# Altium PCB 51 MCU Development board.PcbDoc
Units mm, origin at the board's own origin, x right, y up, seen from the top; angles counter-clockwise.
Board outline 114.38 x 83.01 mm, 2 copper layers (Top Layer, Bottom Layer); 86 components, 111 nets, 316 pads, 127 vias.
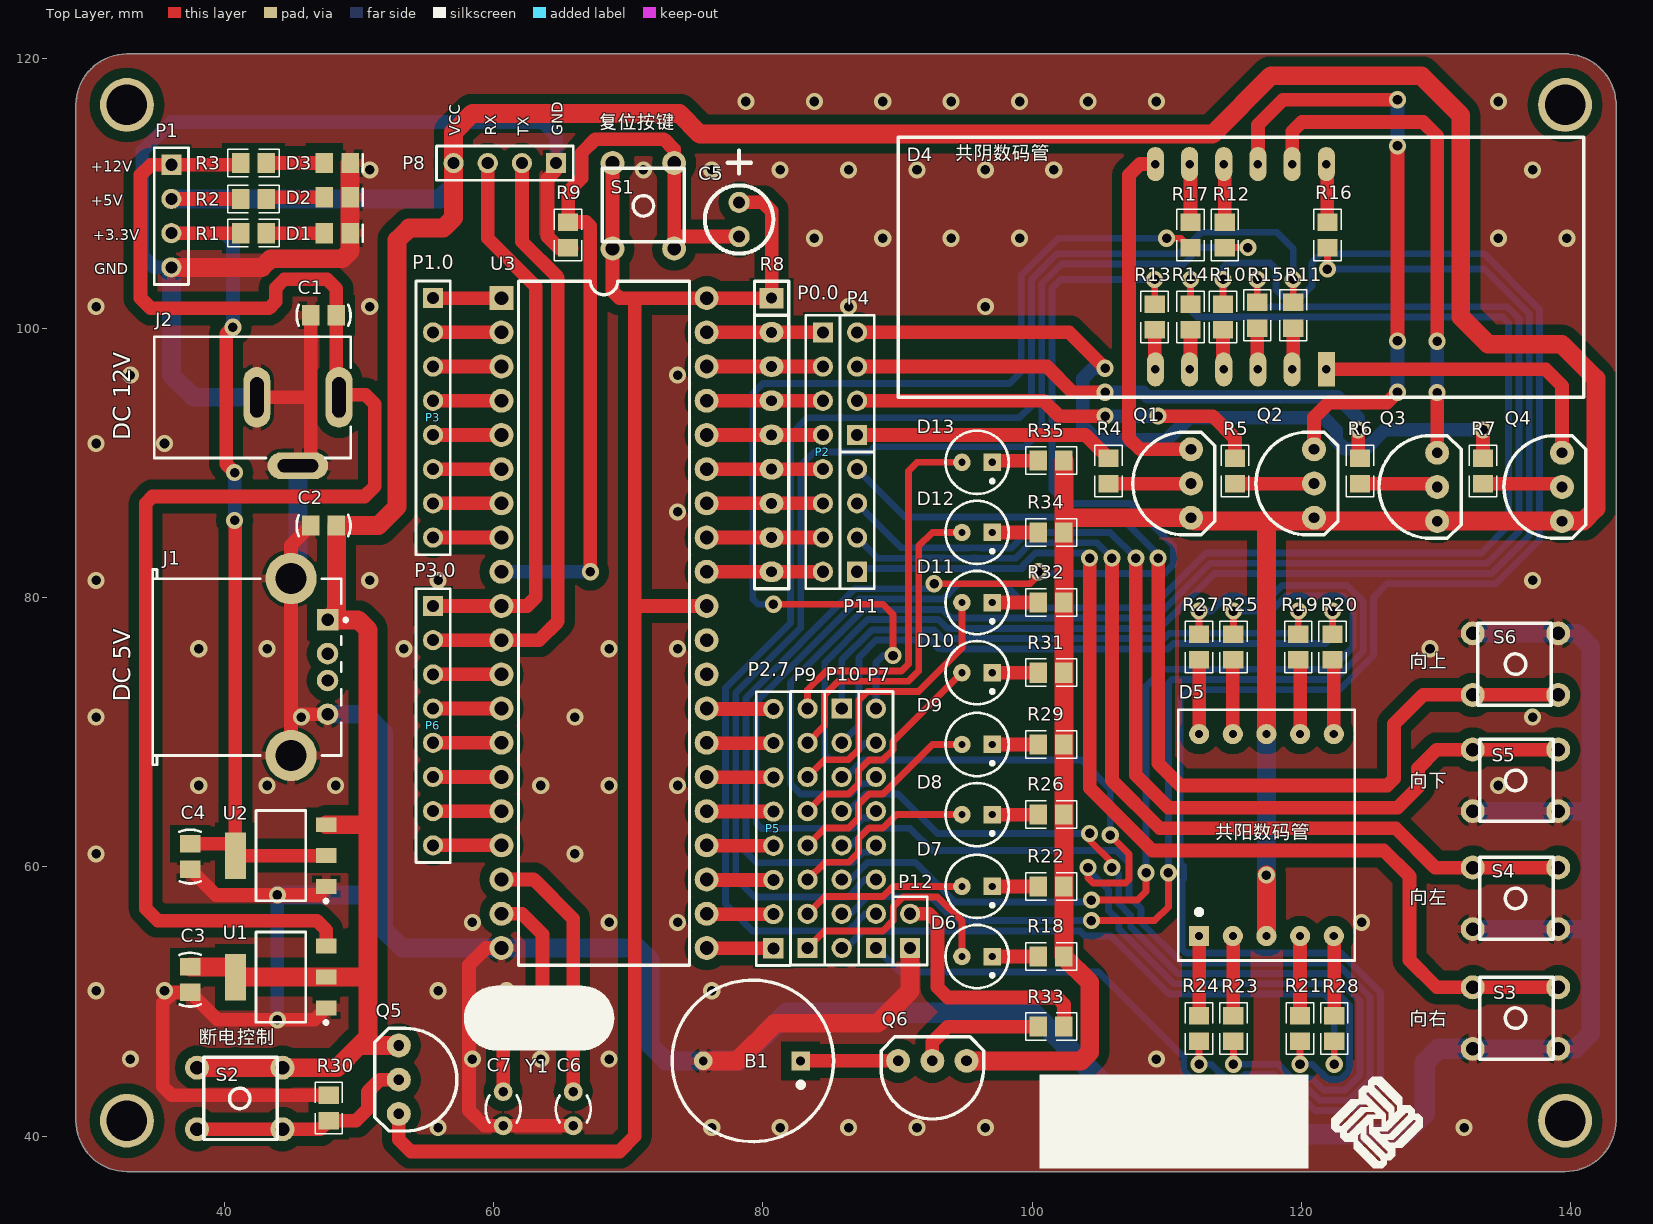
[diagram p0: Top Layer view]
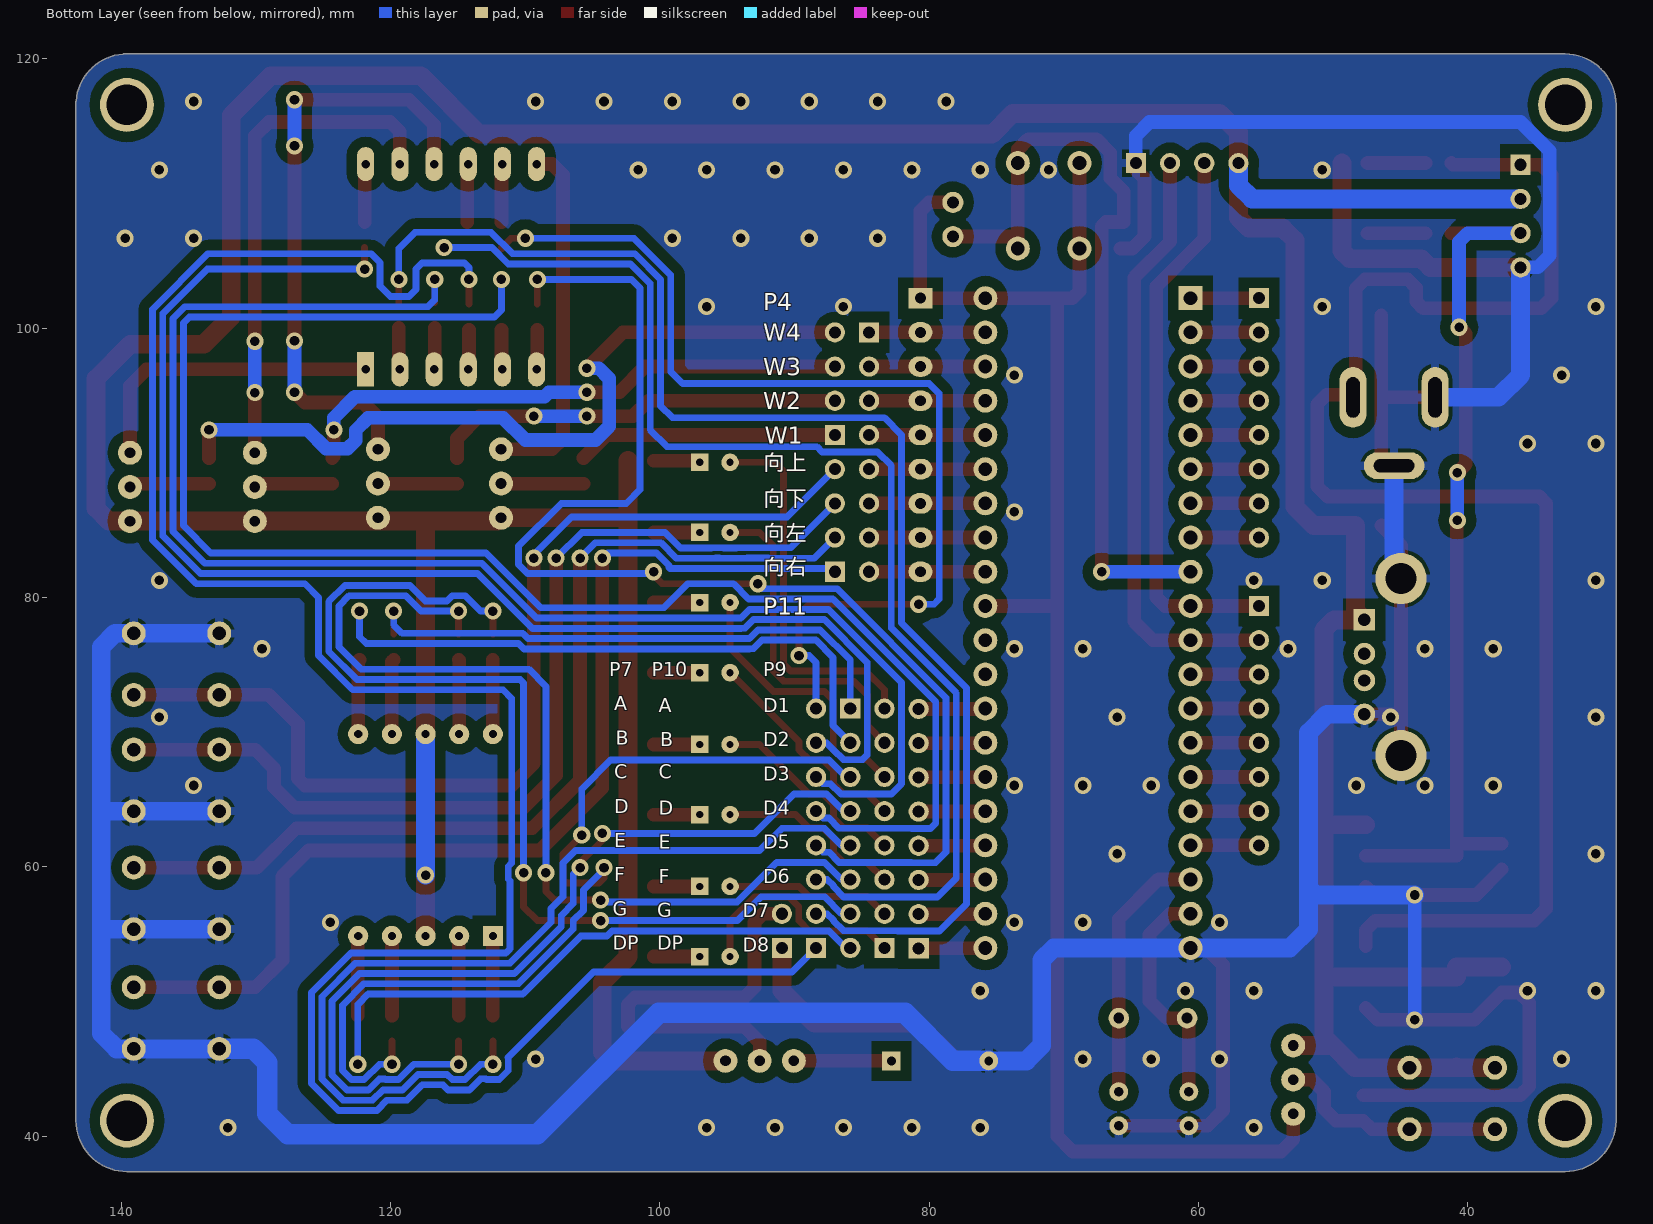
[diagram p1: Bottom Layer view, seen from below]

## Layer stack, top to bottom
Top Solder: solder mask 0.0102, Solder Resist, Dk 3.5
Top Layer: signal copper 0.0356
Dielectric 1: dielectric 0.32, FR-4, Dk 4.8
Bottom Layer: signal copper 0.0356
Bottom Solder: solder mask 0.0102, Solder Resist, Dk 3.5

## Board outline
32.766,37.363 cw(c32.766,41.148) 28.981,41.147 cw(c32.766,41.148) 28.981,41.148 28.981,116.586 cw(c32.766,116.586) 32.766,120.371 139.827,120.371 cw(c139.827,120.269) 139.875,120.359 cw(c139.573,116.586) 143.346,116.888 cw(c143.256,116.84) 143.358,116.84 143.358,116.586 ccw(c143.256,116.586) 143.358,116.586 ccw(c139.573,116.586) 143.358,116.586 143.358,41.149 143.358,41.148 ccw(c143.256,41.148) 143.358,41.149 143.358,41.148 cw(c139.573,41.148) 139.573,37.363

## Design rules (kind name [scope] priority, off if disabled: settings)
Clearance Clearance_1 [InPolygon] p1: gap=0.762 ignorepadtopadclearanceinfootprint=FALSE
Clearance [All] p2: gap=0.254 ignorepadtopadclearanceinfootprint=FALSE
ComponentClearance [All] p1 off: gap=0.254 collisioncheckmode=3 verticalgap=0.254 showdistances=FALSE
PolygonConnect PolygonConnect_1 [isvia] p1: connectstyle=Direct reliefconductorwidth=0.254 reliefentries=4 polygonreliefangle="90 Angle" airgapwidth=0.254
PolygonConnect [All] p2: connectstyle=Relief reliefconductorwidth=0.635 reliefentries=4 polygonreliefangle="90 Angle" airgapwidth=0.254
RoutingVias [All] p1: holewidth=0.711 width=1.27 viastyle="Through Hole" minholewidth=0.711 minwidth=1.27 maxholewidth=0.711 maxwidth=1.27
SolderMaskExpansion [All] p1: expansion=0.102
Width [All] p1: maxlimit=2.54 minlimit=0.254 preferedwidth=0.254
29 further rules are at their usual default settings.

## Components (designator, comment, footprint, x,y, rotation, side; value= is the part's Value field where it differs from the comment)
B1 "蜂鸣器" 蜂鸣器 82.804,45.593 r180 top
C1 "Cap" C-RAD-0805 47.371,100.965 r0 top
C2 "Cap" C-RAD-0805 47.371,85.344 r0 top
C3 "Cap" C-RAD-0805 37.465,51.623 r90 top
C4 "Cap" C-RAD-0805 37.465,60.767 r90 top
C5 "Cap Pol1" 10UF 78.232,109.347 r270 top value=10uF
C6 "Cap" C-RAD 65.913,42.037 r90 top
C7 "Cap" C-RAD 60.706,42.037 r90 top
D1 "LED0" LED_0805 48.387,107.061 r0 top
D2 "LED0" LED_0805 48.387,109.728 r0 top
D3 "LED0" LED_0805 48.387,112.268 r0 top
D4 "4_8SEG_LED" 4BIT_8SEG_LED 108.204,105.156 r0 top
D5 "八位数码管" 八位数码管 112.395,54.864 r0 top
D6 "LED0" LED直插 97.028,53.34 r180 top
D7 "LED0" LED直插 97.028,58.547 r180 top
D8 "LED0" LED直插 97.028,63.881 r180 top
D9 "LED0" LED直插 97.028,69.088 r180 top
D10 "LED0" LED直插 97.028,74.422 r180 top
D11 "LED0" LED直插 97.028,79.629 r180 top
D12 "LED0" LED直插 97.028,84.836 r180 top
D13 "LED0" LED直插 97.028,90.043 r180 top
J1 "USB" USB_A1 34.678,74.837 r180 top
J2 "PWRCON" DC-005 49.403,94.869 r180 top
P1 "Header 4" HDR4X1_A 36.068,112.141 r270 top
P2 "Header 8" HDR1X8 84.455,99.695 r270 top
P3 "Header 8" HDR1X8 55.499,102.235 r270 top
P4 "Header 4" HDR4X1_A 86.995,92.075 r90 top
P5 "Header 8" HDR1X8 80.772,53.948 r90 top
P6 "Header 8" HDR1X8 55.499,79.375 r270 top
P7 "Header 8" HDR1X8 88.392,53.975 r90 top
P8 "串口" HDR4X1_A 64.643,112.268 r180 top
P9 "Header 8" HDR1X8 83.312,53.975 r90 top
P10 "Header 8" HDR1X8 85.852,71.755 r270 top
P11 "Header 4" HDR4X1_A 86.995,81.915 r90 top
P12 "Header 2" HDR2X1_A 90.932,53.975 r90 top
Q1 "PNP" TO-92 114.173,85.979 r90 top
Q2 "PNP" TO-92 123.317,85.979 r90 top
Q3 "PNP" TO-92 132.461,85.725 r90 top
Q4 "PNP" TO-92 141.732,85.725 r90 top
Q5 "PNP" TO-92 50.571,46.685 r270 top
Q6 "PNP" TO-92 95.072,47.981 r180 top
R1 "Res1" 0805-1 42.164,107.061 r0 top
R2 "Res1" 0805-1 42.164,109.601 r0 top
R3 "Res1" 0805-1 42.164,112.268 r0 top
R4 "Res1" 0805-1 105.664,89.408 r90 top
R5 "Res1" 0805-1 115.062,89.408 r90 top
R6 "Res1" 0805-1 124.333,89.408 r90 top
R7 "Res1" 0805-1 133.477,89.408 r90 top
R8 "RES10" SIP9 80.645,102.235 r270 top
R9 "Res1" 0805-1 65.532,106.934 r90 top
R10 "Res1" 0805-1 114.173,100.838 r270 top
R11 "Res1" 0805-1 119.38,100.965 r270 top
R12 "Res1" 0805-1 114.3,106.934 r90 top
R13 "Res1" 0805-1 109.093,100.838 r270 top
R14 "Res1" 0805-1 111.76,100.838 r270 top
R15 "Res1" 0805-1 116.713,100.965 r270 top
R16 "Res1" 0805-1 121.92,106.934 r90 top
R17 "Res1" 0805-1 111.76,106.934 r90 top
R18 "Res1" 0805-1 101.407,53.34 r180 top
R19 "Res1" 0805-1 119.761,76.327 r270 top
R20 "Res1" 0805-1 122.301,76.327 r270 top
R21 "Res1" 0805-1 119.888,48.006 r90 top
R22 "Res1" 0805-1 101.407,58.547 r180 top
R23 "Res1" 0805-1 114.935,48.006 r90 top
R24 "Res1" 0805-1 112.395,48.006 r90 top
R25 "Res1" 0805-1 114.935,76.327 r270 top
R26 "Res1" 0805-1 101.407,63.881 r180 top
R27 "Res1" 0805-1 112.395,76.327 r270 top
R28 "Res1" 0805-1 122.428,48.006 r90 top
R29 "Res1" 0805-1 101.407,69.088 r180 top
R30 "Res1" 0805-1 47.752,42.098 r270 top
R31 "Res1" 0805-1 101.407,74.422 r180 top
R32 "Res1" 0805-1 101.407,79.629 r180 top
R33 "Res1" 0805-1 101.407,48.133 r0 top
R34 "Res1" 0805-1 101.407,84.836 r180 top
R35 "Res1" 0805-1 101.407,90.17 r180 top
S1 "SW-PB4" AN66 71.12,109.093 r180 top
S2 "SW-PB4" AN66 41.148,42.799 r90 top
S3 "SW-PB4" AN66 135.89,48.768 r90 top
S4 "SW-PB4" AN66 135.89,57.658 r90 top
S5 "SW-PB4" AN66 135.89,66.421 r90 top
S6 "SW-PB4" AN66 135.89,75.057 r270 top
U1 "ASM1117_5V" SOT-223 44.196,51.816 r90 top
U2 "ASM1117_3.3V" SOT-223 44.196,60.833 r90 top
U3 "STC89C52RC" DIP-40W 60.579,102.235 r0 top
Y1 "XTAL" X-HC49U 63.373,48.768 r0 top value=12M

## Footprints (in the part's own frame and the unit in brackets; to place one, negate y for a bottom-side part, rotate by r counter-clockwise, add the part's x,y. Pads: shape width x height; smd on the part's side, far side on the other; paste and mask are expansions set on the pad)
4BIT_8SEG_LED [mil]
  oval 50x100 hole 25: a(137,277) b(537,277) c(337,-323) d(137,-323) e(37,-323) f(237,277) g(437,-323) h(237,-323) M1(37,277) M2(337,277) M3(437,277)
  rect 50x100 hole 25: M4(537,-323)
  silkscreen extent -715,-405 1290,355
10UF [mil]
  round 62 hole 35.43: 1(0,0) 2(100,0)
  silkscreen extent -152,-100 150,100
0805-1 [mm] "贴片带丝印"
  rect 1.3x1.5 smd: 1(-0.95,0) 2(0.95,0)
  silkscreen extent -1.91,-1.02 1.91,1.02, body extent -1.14,-0.51 1.14,0.51, height 1
AN66 [mil]
  round 70 hole 40: 1(-90,125) 2(90,125) 3(90,-125) 4(-90,-125)
  silkscreen extent -120,-110 120,105
C-RAD [mm] "瓷片电容"
  round 1.4 hole 0.7: 1(-1.27,0) 2(1.27,0)
  silkscreen extent -1.02,-1.3 0.98,1.3
C-RAD-0805 [mm] "贴片电容"
  rect 1.3x1.5 smd: 1(-0.95,0) 2(0.95,0)
  silkscreen extent -2,-0.79 2,0.79, body extent -1.27,-0.64 1.27,0.64, height 0.9
DC-005 [mm] "DC母座5.5mm"
  oval 2x4.5 hole 1 slot 3 at 90 deg: 1(0.889,0) 2(6.985,0)
  oval 4.5x2 hole 1 slot 3 at 0 deg: 3(3.937,5.08)
  silkscreen extent 0,-4.5 14.6,4.5, body extent 0,-4.44 14.6,4.45, height 11
DIP-40W [mil]
  rect 70x70 hole 40: 1(0,0)
  round 70 hole 40: 2(0,-100) 3(0,-200) 4(0,-300) 5(0,-400) 6(0,-500) 7(0,-600) 8(0,-700) 9(0,-800) 10(0,-900) 11(0,-1000) 12(0,-1100) 13(0,-1200) 14(0,-1300) 15(0,-1400) 16(0,-1500) 17(0,-1600) 18(0,-1700) 19(0,-1800) 20(0,-1900) 21(600,-1900) 22(600,-1800) 23(600,-1700) 24(600,-1600) 25(600,-1500) 26(600,-1400) 27(600,-1300) 28(600,-1200) 29(600,-1100) 30(600,-1000) 31(600,-900) 32(600,-800) 33(600,-700) 34(600,-600) 35(600,-500) 36(600,-400) 37(600,-300) 38(600,-200) 39(600,-100) 40(600,0)
  silkscreen extent 50,-1950 550,50
HDR1X8 [mm] "Connector; Header; 8 Position"
  rect 1.5x1.5 hole 0.9: 1(0,0)
  round 1.5 hole 0.9: 2(2.54,0) 3(5.08,0) 4(7.62,0) 5(10.16,0) 6(12.7,0) 7(15.24,0) 8(17.78,0)
  silkscreen extent -1.27,-1.27 19.05,1.27
HDR2X1_A [mm] "Connector; Header; 2 Position"
  rect 1.5x1.5 hole 0.9: 1(0,0)
  round 1.5 hole 0.9: 2(2.54,0)
  silkscreen extent -1.27,-1.27 3.81,1.27
HDR4X1_A [mm] "Connector; Header; 4 Position"
  rect 1.5x1.5 hole 0.9: 1(0,0)
  round 1.5 hole 0.9: 2(2.54,0) 3(5.08,0) 4(7.62,0)
  silkscreen extent -1.27,-1.27 8.89,1.27
LED_0805 [mm] "贴片二极管"
  rect 1.3x1.5 smd: 1(-0.95,0) 2(0.95,0)
  silkscreen extent 1.91,-0.64 1.91,0.64
LED直插 [mm]
  rect 1.3x1.3 hole 0.54: 1(0,0)
  round 1.3 hole 0.54: 2(2.25,0)
  silkscreen extent -1.22,-2.35 3.48,2.35
SIP9 [mil]
  rect 60x70 hole 32: 1(0,0)
  oval 60x70 hole 32: 2(100,0) 3(200,0) 4(300,0) 5(400,0) 6(500,0) 7(600,0) 8(700,0) 9(800,0)
  silkscreen extent -50,-50 850,50
SOT-223 [mm]
  rect 1.1x1.55 smd: 1(-2.3,-3.375) 2(0,-3.375) 3(2.3,-3.375)
  rect 3.45x1.55 smd: 4(0,3.375)
  silkscreen extent -3.5,-3.48 3.35,1.85, body extent -3.3,-3.94 3.3,3.43, height 0.8
TO-92 [mil]
  round 70 hole 31.5: B(98,94) C(198,94) E(-2,94)
  silkscreen extent -52,24 248,264
USB_A1 [mm]
  rect 1.6x1.6 hole 0.92: 1(-12.99,-3.5)
  round 1.6 hole 0.92: 2(-12.99,-1) 3(-12.99,1) 4(-12.99,3.5)
  round 3.8 hole 2.3: 5(-10.28,6.57) 6(-10.28,-6.57)
  silkscreen extent -14.47,-7.25 0,7.25
X-HC49U [mil] "插件晶振"
  round 60 hole 32: 1(-100,0) 2(100,0)
  silkscreen extent -215,-90 215,90
八位数码管 [mm]
  rect 1.5x1.5 hole 0.6: 1(0,0)
  round 1.5 hole 0.6: 2(2.5,0) 3(5,0) 4(7.5,0) 5(10,0) 6(10,15) 7(7.5,15) 8(5,15) 9(2.5,15) 10(0,15)
  silkscreen extent -1.56,-1.81 11.56,16.81
蜂鸣器 [mm]
  rect 1.4x1.4 hole 0.66: 1(0,0)
  round 1.4 hole 0.66: 2(7.239,0)
  silkscreen extent -2.44,-6 9.55,6

## Part data
C1 C2 C3 C4 C6 C7: "无极性电容"
C5: "Polarized Capacitor (Radial)", LatestRevisionDate=17-Jul-2002, LatestRevisionNote="Re-released for DXP Platform.", PackageDescription="Polarized Capacitor (Radial); 2 Leads", PackageReference=RB7.6-15, Published=8-Jun-2000, Publisher="Altium Limited"
D1 D2 D3 D6 D7 D8 D9 D10 D11 D12 D13: "发光二极管"
  D6 D7 D8 D9 D10 D11 D12 D13: LatestRevisionDate=08-Jul-2005, LatestRevisionNote="Mech Layer 1 removed.", PackageReference=LED-0, Published=8-Jun-2000, Publisher="Altium Limited"
J1: "USB接口"
J2: "直流电源端子"
P1 P4 P11 P12: "接插件", LatestRevisionDate=17-Jul-2002, LatestRevisionNote="Re-released for DXP Platform.", Publisher="Altium Limited"
P2 P3 P5 P6 P7 P9 P10: "Header, 8-Pin", LatestRevisionDate=17-Jul-2002, LatestRevisionNote="Re-released for DXP Platform.", Publisher="Altium Limited"
P8: library part "Header 4", "接插件", LatestRevisionDate=17-Jul-2002, LatestRevisionNote="Re-released for DXP Platform.", Publisher="Altium Limited"
R1 R2 R3 R4 R5 R6 R7 R9 R10 R11 R12 R13 R14 R15 R16 R17 R18 R19 R20 R21 R22 R23 R24 R25 R26 R27 R28 R29 R30 R31 R32 R33 R34 R35: "贴片电阻"
S1 S2 S3 S4 S5 S6: "微动开关", LatestRevisionDate=17-Jul-2002, LatestRevisionNote="Re-released for DXP Platform.", PackageReference=SPST-2, Published=24-Mar-1999, Publisher="Altium Limited"
U1 U2: library part ASM1117, "3.3V稳压芯片"
Y1: "晶振", LatestRevisionDate=17-Jul-2002, LatestRevisionNote="Re-released for DXP Platform.", PackageReference=R38, Published=8-Jun-2000, Publisher="Altium Limited"

## Free pads (board coordinates)
  round 4 hole 3 unplated: 0(32.766,41.148) 0(32.766,116.586) 0(139.573,41.148) 0(139.573,116.586)

## Via types
v1: diameter 1.27, hole 0.711, Top Layer to Bottom Layer, tented both sides, 127 vias

## Nets (pads, with @x,y where several pads share a name; then routed paths per layer and width w, separated by ;. In a path a pad name is that pad's centre, name@x,y a point inside that pad or via, vN(x,y) a via of type N, cw(c..) or ccw(c..) an arc to the next point about the centre after c; other vN are vias at no path point)
+3.3V: C4.2 P1.3 R1.1 U2.2 U2.4 | length 66.2
  Top Layer w1.016: P1.3 R1.1 ; C4.2 40.645,61.717 U2.4@40.821,61.541 ; v1(40.64,100.076) 40.132,99.568 40.132,89.916 v1(40.767,89.281) ; v1(40.767,85.725) 40.821,85.671 U2.4@40.821,61.541 ; U2.2 U2.4 U2.4@40.821,61.541
  Bottom Layer w1.016: P1.3 40.005,107.061 40.64,106.426 v1(40.64,100.076) ; v1(40.767,85.725) v1(40.767,89.281)
+5V: C2.2 C3.2 D5.3 D5.8 J1.1 P1.2 P8.4 Q1.E Q2.E Q3.E Q4.E Q5.E Q6.E R2.1 R18.1 R22.1 R26.1 R29.1 R31.1 R32.1 R34.1 R35.1 S2.2 S2.3 U1.2 U1.4 U2.3 | length 379.5
  Top Layer w1.016: P1.2 R2.1
  Top Layer w1.397: C3.2 40.821,52.573 U1.4 U1.2 50.673,51.816 ; S2.2 40.894,45.085 ; 40.821,45.158 40.894,45.085 ; U2.3 50.673,63.133 ; Q5.E 50.038,46.736 ; Q6.E 103.632,45.593 104.267,46.228 104.267,51.43 R18.1 R22.1 R26.1 R29.1 R31.1 R32.1 R34.1 102.357,86.106 ; R35.1 102.357,86.106 ; D5.3 v1(117.395,59.389) ; D5.8 117.395,85.594 117.475,85.674 ; 40.894,45.085 S2.3 48.387,45.085 50.038,46.736 ; 50.038,46.736 50.673,47.371 50.673,51.816 ; 50.673,51.816 50.673,63.133 ; 50.673,63.133 50.673,77.597 49.933,78.337 J1.1 48.321,78.99 C2.2 51.435,85.344 52.832,86.741 52.832,106.553 53.721,107.442 56.261,107.442 57.023,108.204 P8.4 57.023,114.554 58.42,115.951 73.787,115.951 75.324,114.414 113.398,114.414 117.729,118.745 128.905,118.745 131.826,115.824 131.826,100.838 133.858,98.806 139.319,98.806 141.859,96.266 141.859,86.614 140.919,85.674 Q4.E Q3.E 117.475,85.674 ; 102.357,86.106 102.535,85.928 Q1.E 112.039,85.674 117.475,85.674
  Bottom Layer w1.397: P1.2 56.007,109.601 57.023,110.617 P8.4 ; v1(117.395,59.389) D5.8
+5V_MCU: C5.1 Q5.C R8.1 S1.2 S1.3 U3.31 U3.40 | length 118.6
  Top Layer w1.016: Q5.C 52.959,39.751 53.848,38.862 69.342,38.862 70.485,40.005 70.485,79.248 ; S1.3 S1.2 68.834,102.743 69.342,102.235 70.358,102.235 ; U3.31 70.612,79.375 70.485,79.248 ; C5.1 80.01,109.347 80.645,108.712 R8.1 U3.40 70.358,102.235 ; 70.358,102.235 70.485,102.108 70.485,79.248
+12V: C1.2 J2.1 P1.1 R3.1 U1.3 | length 113.9
  Top Layer w1.016: R3.1 41.087,112.141 P1.1 34.544,112.141 33.782,111.379 33.782,102.235 34.544,101.473 43.307,101.473 43.815,101.981 43.815,102.997 44.45,103.632 47.625,103.632 48.321,102.936 C1.2 J2.1@48.321,95.062 ; U1.3 47.571,55.299 46.863,56.007 35.052,56.007 34.163,56.896 34.163,86.995 34.671,87.503 50.419,87.503 51.181,88.265 51.181,94.361 50.48,95.062 J2.1@48.321,95.062 ; J2.1 J2.1@48.321,95.062
GND: B1.2 C1.1 C2.1 C3.1 C4.1 C6.1 C7.1 D1.2 D2.2 D3.2 J1.4 J1.5 J1.6 J2.2 J2.3 P1.4 P8.1 P12.1 R9.1 R30.1 S3.1 S3.4 S4.1 S4.4 S5.1 S5.4 S6.1 S6.4 U1.1 U2.1 U3.20 | length 419.4
  Top Layer w1.016: C4.1 39.37,57.912 v1(43.942,57.912) 46.95,57.912 U2.1 ; J2.2 46.294,94.869 46.421,94.996 ; J1.5 44.958,71.374 ; J2.3 46.421,89.789 46.421,94.996 ; C2.1 44.958,83.881 J1.6 44.958,71.374 ; C1.1 46.421,94.996 ; U1.1 46.696,48.641 v1(43.942,48.641) 39.497,48.641 C3.1 36.195,50.673 35.433,49.911 35.433,43.688 36.073,43.048 R30.1 ; J1.4 44.995,71.337 44.958,71.374 ; U3.20 59.436,53.975 58.166,52.705 58.166,41.91 59.309,40.767 C7.1 C6.1 ; P8.1 64.643,111.76 64.008,111.125 64.008,106.807 64.897,105.918 R9.1@65.786,105.918
  Top Layer w1.397: P1.4 42.799,104.521 43.434,105.156 48.768,105.156 49.337,105.725 D1.2 D2.2 D3.2 ; B1.2 78.105,45.593 80.899,48.387 88.519,48.387 90.932,50.8 P12.1
  Bottom Layer w1.016: P1.4 34.798,104.521 33.909,105.41 33.909,113.157 36.068,115.316 63.627,115.316 64.643,114.3 P8.1 ; v1(43.942,48.641) v1(43.942,57.912)
  Bottom Layer w1.397: P1.4 36.068,96.52 37.719,94.869 J2.2 ; v1(43.942,57.912) 51.308,57.912 51.816,58.42 ; J1.6 45.466,81.915 J2.3 ; J1.4 50.456,71.337 51.816,69.977 51.816,58.42 ; B1.2 72.771,45.593 71.628,46.736 71.628,53.086 70.739,53.975 U3.20 53.213,53.975 51.816,55.372 51.816,58.42 ; S3.1 S3.4 140.335,46.482 141.478,47.625 141.478,55.626 ; S4.1 S4.4 141.224,55.372 141.478,55.626 ; S5.1 S5.4 141.097,64.135 141.478,64.516 ; S6.4 S6.1 140.462,77.343 141.478,76.327 141.478,64.516 ; 141.478,55.626 141.478,64.516
  Bottom Layer w1.524: B1.2 78.232,45.593 81.788,49.149 100.076,49.149 109.093,40.132 127.635,40.132 129.159,41.656 129.159,45.466 130.175,46.482 S3.1
  other v1: 55.88,40.64 76.2,40.64 81.28,40.64 86.36,40.64 91.44,40.64 96.52,40.64 132.08,40.64 33.02,45.72 58.42,45.72 63.5,45.72 68.58,45.72 109.22,45.72 30.48,50.8 35.56,50.8 55.88,50.8 60.96,50.8 76.2,50.8 58.42,55.88 68.58,55.88 73.66,55.88 124.46,55.88 30.48,60.96 66.04,60.96 38.1,66.04 43.18,66.04 48.26,66.04 63.5,66.04 68.58,66.04 73.66,66.04 134.62,66.04 30.48,71.12 45.72,71.12 66.04,71.12 137.16,71.12 38.1,76.2 43.18,76.2 53.34,76.2 68.58,76.2 73.66,76.2 129.54,76.2 30.48,81.28 50.8,81.28 55.88,81.28 137.16,81.28 73.66,86.36 30.48,91.44 35.56,91.44 33.02,96.52 73.66,96.52 30.48,101.6 50.8,101.6 86.36,101.6 96.52,101.6 83.82,106.68 88.9,106.68 93.98,106.68 99.06,106.68 134.62,106.68 139.7,106.68 50.8,111.76 71.12,111.76 76.2,111.76 81.28,111.76 86.36,111.76 91.44,111.76 96.52,111.76 101.6,111.76 137.16,111.76 78.74,116.84 83.82,116.84 88.9,116.84 93.98,116.84 99.06,116.84 104.14,116.84 109.22,116.84 134.62,116.84
NetB1_1: B1.1 Q6.C | length 7.4
  Top Layer w1.016: B1.1 Q6.C Q6.C@90.248,45.593
NetD1_1: D1.1 R1.2 | length 4.3
  Top Layer w1.016: R1.2 D1.1
NetD2_1: D2.1 R2.2 | length 4.4
  Top Layer w1.016: R2.2 43.241,109.728 D2.1
NetD3_1: D3.1 R3.2 | length 4.3
  Top Layer w1.016: R3.2 D3.1
NetD4_a: D4.a R17.2 | length 4.3
  Top Layer w1.016: D4.a 111.76,112.116 R17.2
NetD4_b: D4.b R16.2 | length 4.3
  Top Layer w1.016: D4.b 121.92,112.116 R16.2
NetD4_c: D4.c R15.2 | length 3.1
  Top Layer w1.016: R15.2 116.713,97.003 D4.c
NetD4_d: D4.d R14.2 | length 3
  Top Layer w1.016: D4.d 111.76,97.028 R14.2
NetD4_e: D4.e R13.2 | length 3
  Top Layer w1.016: R13.2 109.093,97.003 D4.e
NetD4_f: D4.f R12.2 | length 4.3
  Top Layer w1.016: D4.f 114.3,112.116 R12.2
NetD4_g: D4.g R11.2 | length 3.1
  Top Layer w1.016: D4.g 119.38,97.028 R11.2
NetD4_h: D4.h R10.2 | length 3
  Top Layer w1.016: R10.2 114.173,97.003 D4.h
NetD4_M1: D4.M1 Q1.C | length 26.8
  Top Layer w1.016: D4.M1 108.001,112.192 107.188,111.379 107.188,91.821 108.001,91.008 Q1.C
NetD4_M2: D4.M2 Q2.C | length 45.2
  Top Layer w1.016: D4.M2 116.764,115.113 118.618,116.967 v1(127.127,116.967) v1@127.254,116.967 ; Q2.C 120.929,93.37 122.047,94.488 126.365,94.488 v1(127.127,95.25) ; v1(127.127,99.06) v1(127.127,113.538)
  Bottom Layer w1.016: v1(127.127,95.25) v1(127.127,99.06) ; v1(127.127,113.538) v1(127.127,116.967)
NetD4_M3: D4.M3 Q3.C | length 37.4
  Top Layer w1.016: D4.M3 119.304,114.605 120.015,115.316 129.032,115.316 130.073,114.275 v1(130.073,99.035) ; Q3.C v1(130.073,95.225)
  Bottom Layer w1.016: v1(130.073,95.225) v1(130.073,99.035)
NetD4_M4: D4.M4 Q4.C | length 23
  Top Layer w1.016: D4.M4 138.125,96.952 139.344,95.733 Q4.C
NetD5_1: D5.1 R24.2 | length 5.9
  Top Layer w1.016: R24.2 D5.1
NetD5_2: D5.2 R23.2 | length 5.9
  Top Layer w1.016: D5.2 114.935,54.824 R23.2
NetD5_4: D5.4 R21.2 | length 5.9
  Top Layer w1.016: R21.2 119.888,54.857 D5.4
NetD5_5: D5.5 R28.2 | length 5.9
  Top Layer w1.016: D5.5 122.428,54.831 R28.2
NetD5_6: D5.6 R20.2 | length 5.6
  Top Layer w1.016: R20.2 122.395,75.283 D5.6
NetD5_7: D5.7 R19.2 | length 5.6
  Top Layer w1.016: R19.2 119.895,75.243 D5.7
NetD5_9: D5.9 R25.2 | length 5.5
  Top Layer w1.016: D5.9 114.895,75.337 R25.2
NetD5_10: D5.10 R27.2 | length 5.5
  Top Layer w1.016: D5.10 R27.2
NetD6_1: D6.1 R18.2 | length 3.4
  Top Layer w1.016: D6.1 R18.2
NetD6_2: D6.2 P9.1 | length 17
  Top Layer w0.508: P9.1 84.582,55.245 88.901,55.245 89.674,56.018 89.674,57.036 90.411,57.773 92.976,57.773 94.778,55.971 D6.2
NetD7_1: D7.1 R22.2 | length 3.4
  Top Layer w1.016: D7.1 R22.2
NetD7_2: D7.2 P9.2 | length 12.3
  Top Layer w0.508: P9.2 84.594,57.797 88.913,57.797 89.663,58.547 D7.2
NetD8_1: D8.1 R26.2 | length 3.4
  Top Layer w1.016: D8.1 R26.2
NetD8_2: D8.2 P9.3 | length 14.1
  Top Layer w0.508: P9.3 84.594,60.337 86.373,60.337 87.11,61.074 87.11,62.092 87.895,62.877 88.913,62.877 89.917,63.881 D8.2
NetD9_1: D9.1 R29.2 | length 3.4
  Top Layer w1.016: D9.1 R29.2
NetD9_2: D9.2 P9.4 | length 15.2
  Top Layer w0.508: P9.4 84.594,62.877 86.373,62.877 87.11,63.614 87.11,64.632 87.895,65.417 88.913,65.417 92.584,69.088 D9.2
NetD10_1: D10.1 R31.2 | length 3.4
  Top Layer w1.016: D10.1 R31.2
NetD10_2: D10.2 P9.5 | length 16.7
  Top Layer w0.508: P9.5 84.582,65.405 86.361,65.405 87.11,66.154 87.11,67.172 87.871,67.933 88.889,67.933 89.65,68.694 89.65,69.294 D10.2
NetD11_1: D11.1 R32.2 | length 3.4
  Top Layer w1.016: D11.1 R32.2
NetD11_2: D11.2 P9.6 | length 21
  Top Layer w0.508: P9.6 84.594,67.957 86.373,67.957 87.122,68.706 87.122,72.39 87.757,73.025 91.567,73.025 94.778,76.236 D11.2
NetD12_1: D12.1 R34.2 | length 3.4
  Top Layer w1.016: D12.1 R34.2
NetD12_2: D12.2 P9.7 | length 24.7
  Top Layer w0.508: P9.7 84.582,70.485 84.582,72.771 85.598,73.787 90.805,73.787 91.567,74.549 91.567,83.82 92.583,84.836 D12.2
NetD13_1: D13.1 R35.2 | length 3.5
  Top Layer w1.016: D13.1 97.155,90.17 R35.2
NetD13_2: D13.2 P9.8 | length 28.3
  Top Layer w0.508: P9.8 83.312,73.152 84.709,74.549 90.297,74.549 90.805,75.057 90.805,89.408 91.44,90.043 D13.2
NetP7_1: P7.1 R10.1 | length 169.3
  Top Layer w0.508: R10.1 v1(114.173,103.632)
  Bottom Layer w0.508: P7.1 90.185,52.182 104.917,52.182 111.269,45.83 ; 111.252,45.812 111.252,44.866 111.922,44.196 112.868,44.196 112.934,44.261 113.319,44.261 114.146,43.434 115.724,43.434 116.105,43.815 117.64,43.815 118.783,42.672 120.246,42.672 121.008,41.91 123.848,41.91 125.857,43.919 125.857,50.669 122.92,53.606 111.435,53.606 111.125,53.916 111.125,58.963 111.252,59.09 111.252,60.036 110.998,60.29 110.998,72.517 111.633,73.152 122.805,73.152 125.349,75.696 125.349,80.01 126.365,81.026 134.428,81.026 137.668,84.266 137.668,101.408 133.539,105.537 121.447,105.537 120.777,104.867 120.777,103.124 120.015,102.362 118.618,102.362 118.11,102.87 118.11,104.394 117.663,104.841 114.493,104.841 114.173,104.521 v1(114.173,103.632)
NetP7_2: P7.2 R11.1 | length 103
  Top Layer w0.508: R11.1 v1(119.38,103.632)
  Bottom Layer w0.508: P7.2 87.565,56.515 87.11,56.06 87.11,55.994 86.373,55.257 82.376,55.257 82.349,55.23 79.233,55.23 77.216,57.247 77.216,73.279 82.042,78.105 82.042,92.075 83.324,93.357 99.072,93.357 99.949,94.234 99.949,103.628 101.858,105.537 110.936,105.537 112.526,107.127 118.171,107.127 119.38,105.918 v1(119.38,103.632)
NetP7_3: P7.3 R12.1 | length 92.2
  Top Layer w0.508: R12.1 v1(116.017,105.984)
  Bottom Layer w0.508: P7.3 87.565,59.055 87.11,58.6 87.11,58.534 86.349,57.773 82.791,57.773 82.788,57.77 79.39,57.77 77.978,59.182 77.978,72.898 82.804,77.724 82.804,89.789 83.832,90.817 87.955,90.817 88.339,91.201 99.456,91.201 100.711,92.456 100.711,103.313 102.173,104.775 111.252,104.775 112.461,105.984 v1(116.017,105.984)
NetP7_4: P7.4 R13.1 | length 94.9
  Top Layer w0.508: v1(92.71,81.026) 99.822,81.026 100.457,81.661 v1(100.457,81.915) ; R13.1 v1(109.093,103.632)
  Bottom Layer w0.508: P7.4 87.884,61.087 87.441,61.087 86.679,60.325 81.308,60.325 81.293,60.31 79.517,60.31 78.74,61.087 78.74,72.553 86.844,80.657 92.341,80.657 v1(92.71,81.026) ; v1(100.457,81.915) 100.584,81.788 109.82,81.788 110.49,82.458 110.49,83.82 107.315,86.995 102.489,86.995 101.473,88.011 101.473,102.997 102.108,103.632 v1(109.093,103.632)
NetP7_5: P7.5 R14.1 | length 124.6
  Top Layer w0.508: R14.1 v1(111.76,103.632)
  Bottom Layer w0.508: P7.5 87.884,63.627 87.441,63.627 86.679,62.865 81.308,62.865 81.293,62.85 79.898,62.85 79.502,63.246 79.502,72.237 87.148,79.883 93.394,79.883 94.537,81.026 97.917,81.026 99.695,79.248 108.843,79.248 112.907,83.312 133.35,83.312 135.382,85.344 135.382,100.395 134.939,100.838 112.268,100.838 111.76,101.346 v1(111.76,103.632)
NetP7_6: P7.6 R15.1 | length 113.1
  Top Layer w0.508: R15.1 v1(116.713,103.632)
  Bottom Layer w0.508: P7.6 87.884,66.167 87.314,66.167 86.552,65.405 82.803,65.405 82.042,66.166 82.042,73.699 87.464,79.121 93.345,79.121 93.98,78.486 94.283,78.486 94.298,78.471 109.143,78.471 113.222,82.55 133.796,82.55 136.144,84.898 136.144,100.711 135.255,101.6 117.221,101.6 116.713,102.108 v1(116.713,103.632)
NetP7_7: P7.7 R16.1 | length 102.5
  Top Layer w0.508: v1(121.92,104.394) R16.1
  Bottom Layer w0.508: 87.11,68.694 86.373,67.957 84.951,67.957 84.594,68.314 84.594,75.174 87.779,78.359 93.029,78.359 93.664,77.724 93.968,77.724 93.983,77.709 109.459,77.709 113.538,81.788 134.112,81.788 136.906,84.582 136.906,101.092 133.604,104.394 v1(121.92,104.394) ; 87.11,68.695 87.63,69.215 P7.7
NetP7_8: P7.8 R17.1 | length 76
  Top Layer w0.508: v1(80.772,79.502) 88.9,79.502 89.662,78.74 v1(89.662,75.692) ; v1(109.982,106.68) 111.064,106.68 R17.1 R17.1@111.694,105.918
  Bottom Layer w0.508: v1(80.772,79.502) 79.629,79.502 79.248,79.883 79.248,95.141 79.992,95.885 98.298,95.885 99.187,96.774 99.187,103.944 101.923,106.68 v1(109.982,106.68) ; P7.8 88.392,75.184 88.9,75.692 v1(89.662,75.692)
NetP10_1: P10.1 R19.1 | length 41.9
  Top Layer w0.508: R19.1 v1(119.761,78.994)
  Bottom Layer w0.508: P10.1 85.852,75.354 88.095,77.597 92.714,77.597 93.349,76.962 93.652,76.962 93.667,76.947 109.775,76.947 110.171,77.343 119.126,77.343 119.761,77.978 v1(119.761,78.994)
NetP10_2: P10.2 R20.1 | length 46.8
  Top Layer w0.508: R20.1 v1(122.301,78.994)
  Bottom Layer w0.508: P10.2 87.134,70.497 87.134,75.559 88.41,76.835 92.398,76.835 93.033,76.2 93.336,76.2 93.351,76.185 110.09,76.185 110.486,76.581 121.793,76.581 122.301,77.089 v1(122.301,78.994)
NetP10_3: P10.3 R21.1 | length 68.7
  Top Layer w0.508: v1(104.14,59.944) 104.14,59.182 104.521,58.801 106.934,58.801 107.188,59.055 107.188,60.96 v1(105.791,62.357) ; v1(119.888,45.339) R21.1
  Bottom Layer w0.508: P10.3 86.169,66.675 87.439,67.945 94.283,67.945 94.298,67.93 103.647,67.93 105.791,65.786 v1(105.791,62.357) ; v1(104.14,59.944) 104.14,59.817 105.664,58.293 105.664,56.769 106.426,56.007 106.426,55.382 110.488,51.32 121.97,51.32 123.571,49.719 123.571,44.866 122.901,44.196 121.955,44.196 120.812,45.339 v1(119.888,45.339)
NetP10_4: P10.4 R23.1 | length 65.5
  Top Layer w0.508: v1(104.267,62.484) 104.267,61.976 105.918,60.325 v1(105.918,59.944) ; v1(114.935,45.339) R23.1
  Bottom Layer w0.508: P10.4 86.36,64.135 87.63,65.405 90.043,65.405 92.964,62.484 v1(104.267,62.484) ; v1(105.918,59.944) 106.426,59.436 106.426,57.277 107.315,56.388 107.315,55.57 110.803,52.082 122.289,52.082 124.333,50.038 124.333,44.55 123.217,43.434 121.639,43.434 120.827,44.246 120.411,44.246 120.361,44.196 119.415,44.196 118.272,45.339 v1(114.935,45.339)
NetP10_5: P10.5 R24.1 | length 69.6
  Top Layer w0.508: v1(112.395,45.339) R24.1
  Bottom Layer w0.508: P10.5 86.487,61.595 87.757,62.865 90.932,62.865 92.583,61.214 106.264,61.214 107.188,60.29 107.188,57.785 108.077,56.896 108.077,55.886 111.119,52.844 122.605,52.844 125.095,50.354 125.095,44.234 123.533,42.672 121.323,42.672 120.561,43.434 119.099,43.434 117.956,44.577 115.789,44.577 115.408,44.196 114.462,44.196 113.319,45.339 v1(112.395,45.339)
NetP10_6: P10.6 R25.1 | length 70.9
  Top Layer w0.508: v1(104.394,57.531) 107.823,57.531 108.458,58.166 v1(108.458,59.563) ; R25.1 v1(114.935,78.994)
  Bottom Layer w0.508: P10.6 86.487,59.055 87.757,60.325 91.313,60.325 94.249,57.389 104.252,57.389 v1(104.394,57.531) ; v1(108.458,59.563) 108.458,73.406 109.728,74.676 122.174,74.676 123.825,76.327 123.825,79.375 123.063,80.137 118.872,80.137 117.729,78.994 v1(114.935,78.994)
NetP10_7: P10.7 R27.1 | length 77.2
  Top Layer w0.508: v1(104.394,56.007) 109.093,56.007 110.109,57.023 v1(110.109,59.563) ; R27.1 v1(112.395,78.994)
  Bottom Layer w0.508: P10.7 86.487,56.515 87.757,57.785 92.456,57.785 94.234,56.007 v1(104.394,56.007) ; v1(110.109,59.563) 110.109,73.66 110.363,73.914 122.49,73.914 124.587,76.011 124.587,79.691 123.379,80.899 118.556,80.899 117.413,79.756 115.789,79.756 115.408,80.137 114.462,80.137 113.319,78.994 v1(112.395,78.994)
NetP10_8: P10.8 R28.1 | length 45.5
  Top Layer w0.508: v1(122.428,45.339) R28.1
  Bottom Layer w0.508: P10.8 86.169,53.975 87.439,55.245 103.54,55.245 103.921,54.864 105.866,54.864 110.172,50.558 121.654,50.558 122.428,49.784 v1(122.428,45.339)
NetP11_1: P11.1 S3.2 S3.3 | length 79.7
  Top Layer w1.016: v1(104.267,82.931) 104.267,65.857 108.91,61.214 126.111,61.214 128.016,59.309 128.016,53.086 130.048,51.054 S3.2 S3.3
  Bottom Layer w0.508: P11.1@86.995,82.154 92.222,82.154 92.237,82.169 93.183,82.169 93.198,82.154 99.234,82.154 99.314,82.234 99.314,82.388 100.238,83.312 103.886,83.312 v1(104.267,82.931)
NetP11_2: P11.2 S4.2 S4.3 | length 72.9
  Top Layer w1.016: v1(105.918,82.931) 105.918,66.421 109.474,62.865 127,62.865 129.921,59.944 S4.2 S4.3
  Bottom Layer w0.508: P11.2 88.534,82.916 91.906,82.916 91.921,82.931 93.499,82.931 93.514,82.916 95.573,82.916 95.588,82.931 95.837,82.931 95.852,82.916 98.764,82.916 99.922,84.074 104.775,84.074 v1(105.918,82.931)
NetP11_3: P11.3 S5.2 S5.3 | length 74.6
  Top Layer w1.016: v1(107.696,82.931) 107.696,66.802 110.109,64.389 127.127,64.389 128.651,65.913 128.651,67.31 130.048,68.707 S5.2 ; S5.2@132.588,68.834 S5.2 ; S5.3 S5.2
  Bottom Layer w0.508: P11.3 90.297,83.693 94.283,83.693 94.298,83.678 95.258,83.678 95.273,83.693 96.153,83.693 96.168,83.678 98.448,83.678 99.606,84.836 105.791,84.836 v1(107.696,82.931)
NetP11_4: P11.4 S6.2 S6.3 | length 76
  Top Layer w1.016: v1(109.347,82.931) 109.347,67.691 110.998,66.04 126.365,66.04 126.873,66.548 126.873,70.612 129.032,72.771 S6.3 S6.2
  Bottom Layer w0.508: P11.4 90.536,85.994 106.538,85.994 109.347,83.185 v1(109.347,82.931)
NetP12_2: P12.2 R33.2 | length 18.7
  Top Layer w1.016: P12.2 92.329,56.515 92.964,55.88 92.964,51.054 93.726,50.292 101.854,50.292 102.357,49.789 R33.2
NetQ1_B: Q1.B R4.1 | length 6.1
  Top Layer w1.016: R4.1 111.775,88.458 Q1.B
NetQ2_B: Q2.B R5.1 | length 5.9
  Top Layer w1.016: R5.1 120.919,88.458 Q2.B
NetQ3_B: Q3.B R6.1 | length 5.8
  Top Layer w1.016: R6.1 129.83,88.458 Q3.B
NetQ4_B: Q4.B R7.1 | length 6
  Top Layer w1.016: R7.1 139.101,88.458 Q4.B
NetQ5_B: Q5.B R30.2 S2.1 S2.4 | length 17.3
  Top Layer w1.016: S2.1 S2.4 47.117,40.513 R30.2 49.784,41.148 50.673,42.037 50.673,43.307 51.562,44.196 Q5.B
NetQ6_B: Q6.B R33.1 | length 9.7
  Top Layer w1.016: Q6.B 92.583,46.99 93.726,48.133 R33.1
P0.0: P2.1 R8.2 U3.39 | length 8.6
  Top Layer w1.016: U3.39 R8.2 P2.1
P0.1: P2.2 R8.3 U3.38 | length 8.6
  Top Layer w1.016: U3.38 R8.3 P2.2
P0.2: P2.3 R8.4 U3.37 | length 8.6
  Top Layer w1.016: U3.37 R8.4 P2.3
P0.3: P2.4 R8.5 U3.36 | length 8.6
  Top Layer w1.016: U3.36 R8.5 P2.4
P0.4: P2.5 R8.6 U3.35 | length 8.6
  Top Layer w1.016: U3.35 R8.6 P2.5
P0.5: P2.6 R8.7 U3.34 | length 8.6
  Top Layer w1.016: U3.34 R8.7 P2.6
P0.6: P2.7 R8.8 U3.33 | length 8.6
  Top Layer w1.016: U3.33 R8.8 P2.7
P0.7: P2.8 R8.9 U3.32 | length 8.6
  Top Layer w1.016: U3.32 R8.9 P2.8
P1.0: P3.1 U3.1 | length 5.1
  Top Layer w1.016: P3.1 U3.1
P1.1: P3.2 U3.2 | length 5.1
  Top Layer w1.016: P3.2 U3.2
P1.2: P3.3 U3.3 | length 5.1
  Top Layer w1.016: P3.3 U3.3
P1.3: P3.4 U3.4 | length 5.1
  Top Layer w1.016: P3.4 U3.4
P1.4: P3.5 U3.5 | length 5.1
  Top Layer w1.016: P3.5 U3.5
P1.5: P3.6 U3.6 | length 5.1
  Top Layer w1.016: P3.6 U3.6
P1.6: P3.7 U3.7 | length 5.1
  Top Layer w1.016: P3.7 U3.7
P1.7: P3.8 U3.8 | length 5.1
  Top Layer w1.016: P3.8 U3.8
P2.0: P5.1 U3.21 | length 5
  Top Layer w1.016: U3.21 75.846,53.948 P5.1
P2.1: P5.2 U3.22 | length 5
  Top Layer w1.016: U3.22 75.846,56.488 P5.2
P2.2: P5.3 U3.23 | length 5
  Top Layer w1.016: U3.23 75.846,59.028 P5.3
P2.3: P5.4 U3.24 | length 5
  Top Layer w1.016: U3.24 75.846,61.568 P5.4
P2.4: P5.5 U3.25 | length 5
  Top Layer w1.016: U3.25 75.846,64.108 P5.5
P2.5: P5.6 U3.26 | length 5
  Top Layer w1.016: U3.26 75.846,66.648 P5.6
P2.6: P5.7 U3.27 | length 5
  Top Layer w1.016: U3.27 75.846,69.188 P5.7
P2.7: P5.8 U3.28 | length 5
  Top Layer w1.016: U3.28 75.846,71.728 P5.8
P3.0: P6.1 P8.3 U3.10 | length 41.6
  Top Layer w1.016: P6.1 U3.10 62.484,79.375 63.119,80.01 63.119,103.124 59.563,106.68 P8.3
P3.1: P6.2 P8.2 U3.11 | length 45
  Top Layer w1.016: P6.2 U3.11 63.373,76.835 64.77,78.232 64.77,103.759 62.103,106.426 P8.2
P3.2: P6.3 U3.12 | length 5.1
  Top Layer w1.016: P6.3 U3.12
P3.3: P6.4 U3.13 | length 5.1
  Top Layer w1.016: P6.4 U3.13
P3.4: P6.5 U3.14 | length 5.1
  Top Layer w1.016: P6.5 U3.14
P3.5: P6.6 U3.15 | length 5.1
  Top Layer w1.016: P6.6 U3.15
P3.6: P6.7 U3.16 | length 5.1
  Top Layer w1.016: P6.7 U3.16
P3.7: P6.8 U3.17 | length 5.1
  Top Layer w1.016: P6.8 U3.17
REST: C5.2 R9.2 S1.1 S1.4 U3.9 | length 59.4
  Top Layer w1.016: v1(67.183,81.915) 67.183,107.569 66.868,107.884 R9.2 65.532,110.133 66.548,111.149 66.548,113.03 67.564,114.046 72.644,114.046 73.406,113.284 S1.4 73.406,106.807 ; S1.1 73.406,106.807 ; C5.2 73.406,106.807
  Bottom Layer w1.016: U3.9 v1(67.183,81.915)
W1: P4.1 R4.2 | length 19.4
  Top Layer w1.016: P4.1 103.947,92.075 R4.2
W2: P4.2 R5.2 | length 30.7
  Top Layer w1.016: P4.2 100.838,94.615 101.981,93.472 v1(105.41,93.472) ; v1(109.347,93.472) 113.411,93.472 115.062,91.821 R5.2
  Bottom Layer w1.016: v1(105.41,93.472) v1(109.347,93.472)
W3: P4.3 R6.2 | length 41.8
  Top Layer w1.016: P4.3 101.092,97.155 102.997,95.25 v1(105.41,95.25) ; v1(124.206,92.456) 124.206,90.485 R6.2
  Bottom Layer w1.016: v1(105.41,95.25) 108.235,95.25 108.565,94.92 122.631,94.92 124.206,93.345 v1(124.206,92.456)
W4: P4.4 R7.2 | length 59.9
  Top Layer w1.016: P4.4 102.743,99.695 v1(105.41,97.028) ; R7.2 v1(133.477,92.456)
  Bottom Layer w1.016: v1(105.41,97.028) 104.521,97.028 103.759,96.266 103.759,92.71 104.775,91.694 109.982,91.694 111.633,93.345 121.666,93.345 122.58,92.431 122.58,91.669 123.19,91.059 124.785,91.059 126.182,92.456 v1(133.477,92.456)
XTAL1: C7.2 U3.19 Y1.1 | length 17.5
  Top Layer w1.016: U3.19 62.103,56.515 63.627,54.991 63.627,50.038 62.357,48.768 Y1.1 60.706,48.641 C7.2
XTAL2: C6.2 U3.18 Y1.2 | length 19.4
  Top Layer w1.016: U3.18 62.992,59.055 65.913,56.134 Y1.2 C6.2
pads on no net: J1.2 J1.3 U3.29 U3.30

## Polygon pours and split planes (outlines as drawn)
GND on Top Layer "Top Layer-No Net" (solid, remove dead copper, pour order 0): 32.766,37.363 cw(c32.766,41.148) 28.981,41.147 cw(c32.762,41.148) 28.981,41.148 28.981,116.586 cw(c32.766,116.586) 32.766,120.371 139.827,120.371 cw(c139.827,120.269) 139.875,120.359 cw(c139.573,116.586) 143.346,116.888 cw(c143.256,116.84) 143.358,116.84 143.358,116.586 ccw(c143.259,116.586) 143.358,116.586 ccw(c139.571,116.586) 143.358,116.586 143.358,41.149 143.358,41.148 ccw(c143.256,41.148) 143.358,41.149 143.358,41.148 cw(c139.573,41.148) 139.573,37.363
GND on Bottom Layer "Top Layer-No Net1" (solid, remove dead copper, pour order 1): 32.766,37.363 cw(c32.766,41.148) 28.981,41.147 cw(c32.762,41.148) 28.981,41.148 28.981,116.586 cw(c32.766,116.586) 32.766,120.371 139.827,120.371 cw(c139.827,120.269) 139.875,120.359 cw(c139.573,116.586) 143.346,116.888 cw(c143.256,116.84) 143.358,116.84 143.358,116.586 ccw(c143.259,116.586) 143.358,116.586 ccw(c139.571,116.586) 143.358,116.586 143.358,41.149 143.358,41.148 ccw(c143.256,41.148) 143.358,41.149 143.358,41.148 cw(c139.573,41.148) 139.573,37.363

## Other copper
Top Layer:
  region: 73.406,112.268

## Silkscreen, mask and mechanical layers (free items; w line width, h text height)
Top Overlay:
  drawing of 895 lines, arcs and shapes, not listed
  text "复位按键" at 67.818,114.427 h1.78
  text "VCC" at 57.531,114.3 h0.81 r90
  text "RX" at 60.198,114.3 h0.81 r90
  text "TX" at 62.611,114.3 h0.81 r90
  text "GND" at 65.151,114.3 h0.81 r90
  text "共阴数码管" at 94.234,112.141 h1.78
  text "+12V" at 30.099,111.633 h0.81
  text "+5V" at 30.099,109.093 h0.81
  text "+3.3V" at 30.226,106.553 h0.81
  text "GND" at 30.353,104.013 h0.81
  text "P1.0" at 53.975,104.013 h1.78
  text "P0.0" at 82.55,101.727 h1.78
  text "DC 12V" at 33.02,91.694 h1.27 r90
  text "P3.0" at 54.102,81.153 h1.78
  text "向上" at 128.016,74.422 h1.78
  text "P2.7" at 78.867,73.787 h1.78
  text "DC 5V" at 33.02,72.263 h1.27 r90
  text "向下" at 128.016,65.532 h1.78
  text "共阳数码管" at 113.538,61.722 h1.78
  text "向左" at 128.016,56.896 h1.78
  text "向右" at 128.016,47.879 h1.78
  text "断电控制" at 38.1,46.482 h1.78
Bottom Overlay:
  text "P4" at 92.329,101.346 h1.27
  text "W4" at 92.329,99.06 h1.27
  text "W3" at 92.329,96.52 h1.27
  text "W2" at 92.329,93.98 h1.27
  text "W1" at 92.202,91.44 h1.27
  text "向上" at 92.329,89.027 h2.03
  text "向下" at 92.329,86.36 h2.03
  text "向左" at 92.329,83.82 h2.03
  text "向右" at 92.329,81.28 h2.03
  text "P11" at 92.329,78.74 h1.27
  text "P9" at 92.329,73.787 h1.78
  text "P10" at 100.584,73.787 h1.78
  text "P7" at 103.759,73.787 h1.78
  text "A" at 103.378,71.247 h1.78
  text "D1" at 92.329,71.12 h1.78
  text "A" at 100.076,71.12 h1.78
  text "B" at 103.251,68.707 h1.78
  text "D2" at 92.329,68.58 h1.78
  text "B" at 99.949,68.58 h1.78
  text "C" at 100.076,66.167 h1.78
  text "C" at 103.378,66.167 h1.78
  text "D3" at 92.329,66.04 h1.78
  text "D" at 103.378,63.627 h1.78
  text "D4" at 92.329,63.5 h1.78
  text "D" at 100.076,63.5 h1.78
  text "E" at 103.378,61.087 h1.78
  text "D5" at 92.329,60.96 h1.78
  text "E" at 100.076,60.96 h1.78
  text "F" at 103.378,58.547 h1.78
  text "D6" at 92.329,58.42 h1.78
  text "F" at 100.076,58.42 h1.78
  text "G" at 103.505,56.007 h1.78
  text "D7" at 93.853,55.88 h1.78
  text "G" at 100.203,55.88 h1.78
  text "DP" at 100.203,53.467 h1.78
  text "DP" at 103.505,53.467 h1.78
  text "D8" at 93.853,53.34 h1.78
Mechanical 1:
  lines w0.203: 139.573,120.269 cw(c139.573,116.586) 143.256,116.586 ; 139.827,120.269 32.766,120.269 ccw(c32.766,116.586) 29.083,116.586 29.083,41.148 ccw(c32.766,41.148) 32.766,37.465 139.573,37.465 ccw(c139.573,41.148) 143.256,41.148 143.256,116.84